# EAGLE board picrocope_hub_v2r3 (EAGLE 9.6.2)
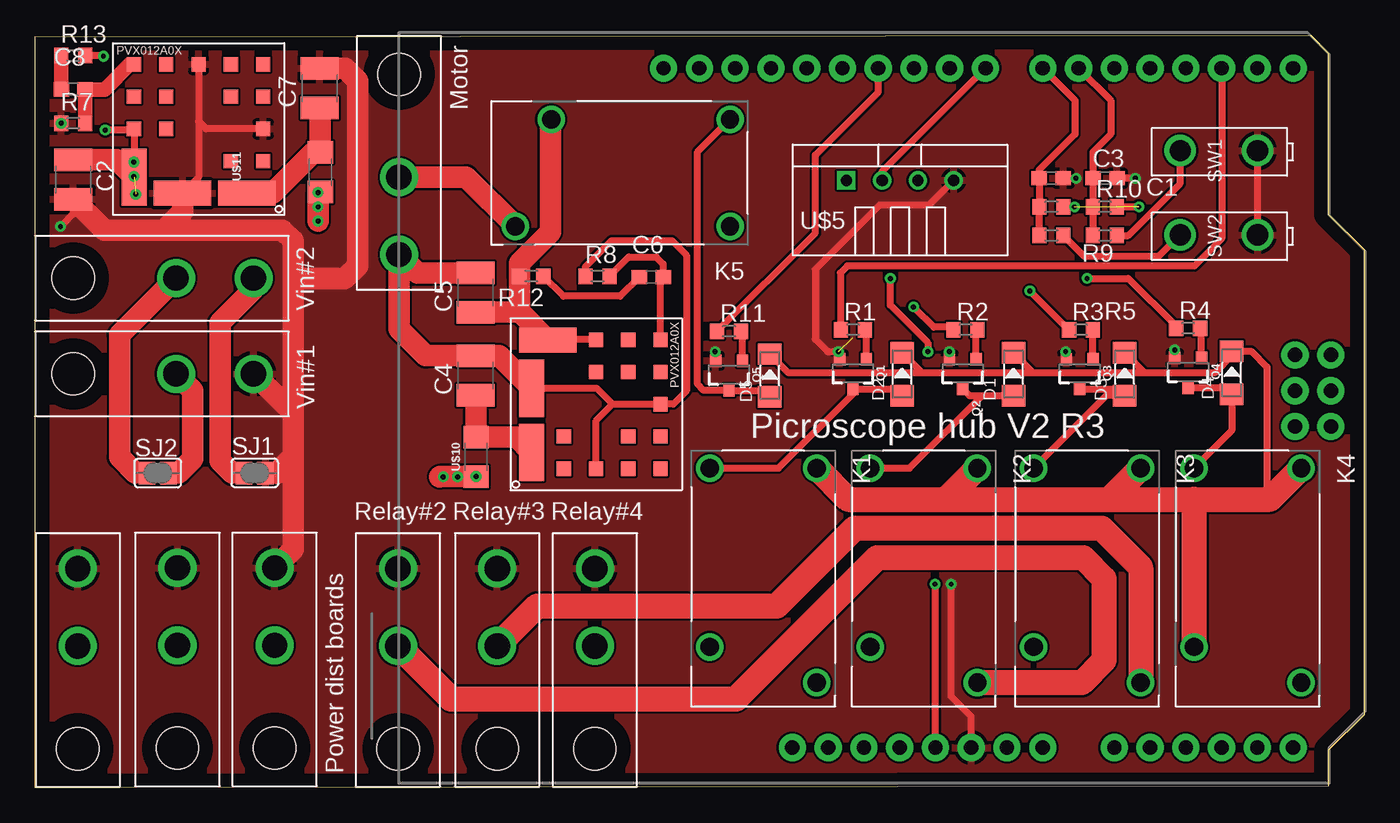
[diagram p0: board, top side]
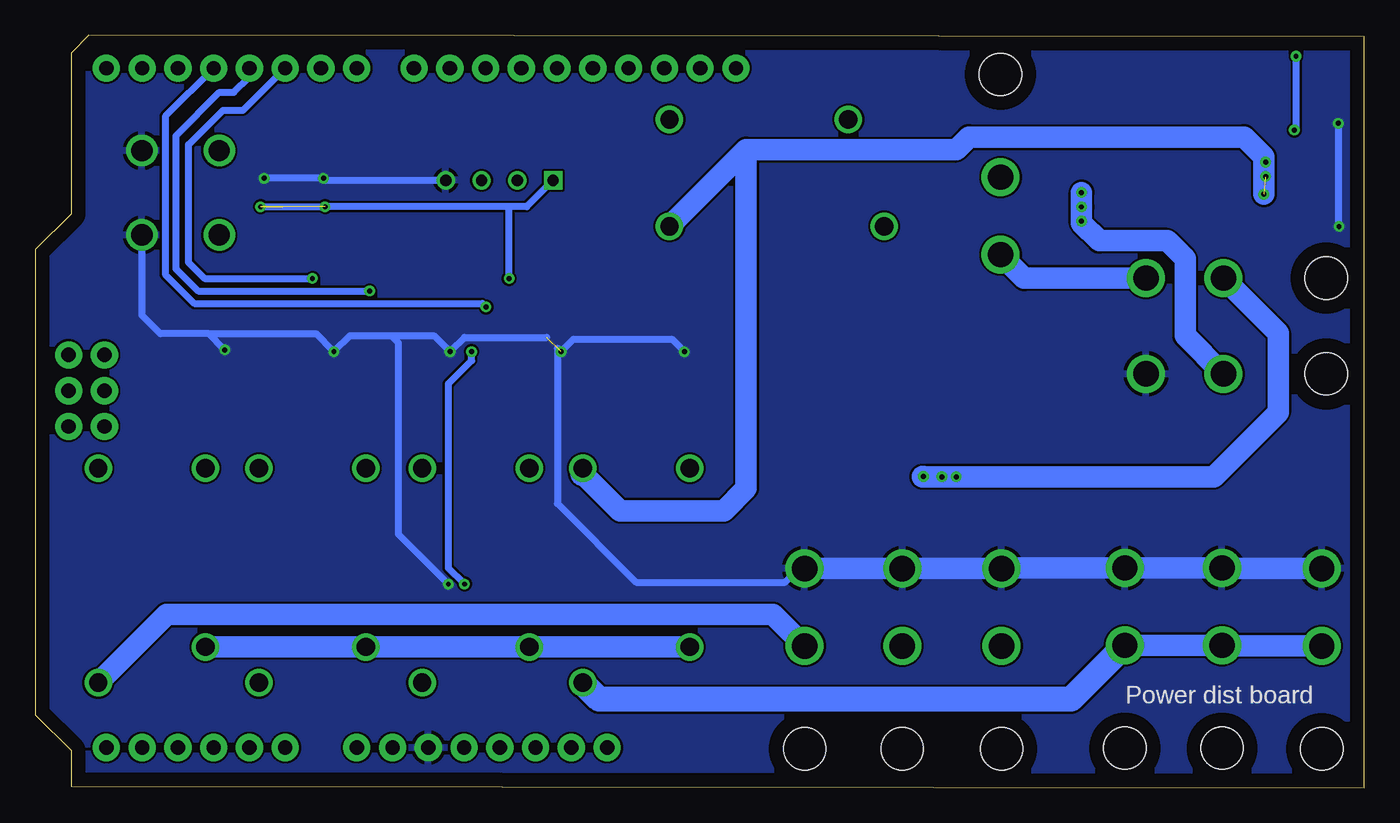
[diagram p1: board, bottom side, seen from below]

Size 94.38 x 53.44 mm. Coordinates in mm from the lower left corner, seen from the top.
Outline: 0,0 0,53.34 90.57,53.44 91.84,52.17 91.84,40.74 94.38,38.2 94.38,5.18 91.84,2.64 91.84,0.1 0,0
Copper layers (1*16): Top 0.035mm / dielectric 1.5mm / Bottom 0.035mm
Design rules "default *": minimum track width 20mil, minimum drill 0.35mm, track to track 6mil, track to pad 6mil, pad to pad 6mil, via to via 6mil, smd to smd 6mil, copper to edge 40mil, drill to drill 6mil, minimum pad ring 10mil, minimum via ring 8mil, stop-mask expansion 4mil, vias tented up to drill 0mil, thermal gap 10mil

## Footprints (pad centres in the part's own frame; a part is rotated, then mirrored left to right if it is on the bottom)
ARDUINO_R3 = drill 1.016 pad 1.93: 3.3V 2.54,-24.13; 5V 5.08,-24.13; A0 17.78,-24.13; A1 20.32,-24.13; A2 22.86,-24.13; A3 25.4,-24.13; A4 27.94,-24.13; A5 30.48,-24.13; AREF -9.144,24.13; D0 30.48,24.13; D1 27.94,24.13; D2 25.4,24.13; D3 22.86,24.13; D4 20.32,24.13; D5 17.78,24.13; D6 15.24,24.13; D7 12.7,24.13; D8 8.636,24.13; D9 6.096,24.13; D10 3.556,24.13; D11 1.016,24.13; D12 -1.524,24.13; D13 -4.064,24.13; GND@1 7.62,-24.13; GND@2 10.16,-24.13; GND@3 -6.604,24.13; GND@4 33.16,-1.32; IOREF -2.54,-24.13; MISO 30.62,3.76; MOSI 33.16,1.22; NC -5.08,-24.13; RESET@1 0,-24.13; RESET@2 30.62,-1.32; SCK 30.62,1.22; SCL -14.224,24.13; SDA -11.684,24.13; VCC 33.16,3.76; VIN 12.7,-24.13
C0603 = smd 1.1 x 1: 1 -0.85,0; 2 0.85,0
C1210 = smd 1.6 x 2.7: 1 -1.4,0; 2 1.4,0
LL-34 = smd 1.524 x 1.676: A -1.524,0; C 1.524,0
RELAY_2071508-1 = drill 1.3: 1 -7.85,3.8; 2 -7.85,-3.8; 3 7.39,3.8; 4 4.85,-3.8
SOT23-3 = smd 0.8 x 0.9: 1 -0.95,-1; 2 0.95,-1; 3 0,1.1
R0603 = smd 1 x 1.1: 1 -0.85,0; 2 0.85,0
SJ = smd 1.168 x 1.6: 1 -0.762,0; 2 0.762,0
PVX012A0X = smd 1.01 x 1.01: 8 3.81,1.52; 9 1.52,1.52; 11 3.81,3.81; 12 8.39,3.81; 13 8.39,6.1; 14 10.68,3.81; 15 8.39,1.52; 16 1.52,8.39; 17 3.81,8.39; GND 6.1,1.52; ON_OFF 1.52,6.1; PGOOD 1.52,3.81; SENSE 10.68,6.1; TRIM 10.68,1.52 | smd 4.07 x 1.77: GRN 7.24,10.67; VIN 2.67,10.67 | smd 1.77 x 4.07: VOUT 10.67,9.53
MINI-FIT_JR_CONN = drill 1.8: P$1 0,0; P$2 0,5.5 | hole 3: 0,-7.3
TEMP-HUM-SENSOR-DHT22 = drill 0.8 square: 1 -3.81,0 | drill 0.8: 2 -1.27,0; 3 1.27,0; 4 3.81,0
1206 = smd 1.6 x 1.8: 1 -1.4,0; 2 1.4,0
MINI-FIT_JR_VERTICAL_CONN = drill 1.5: P$1 0,0.1; P$2 0,5.6

## Placement (x,y rotation side)
B1  ARDUINO_UNO_R3  [ARDUINO_R3]  58.85,26.97 0 top
C1  0.1uF  [C0603]  72.16,43.28 0 top
C2  47 uF  [C1210]  2.7,43.19 270 top
C3  0.1uF  [C0603]  75.97,43.28 0 top
C4  47 uF  [C1210]  31.29,29.28 90 top
C5  47 uF  [C1210]  31.28,35.16 90 top
C6  100pF  [C0603]  43.75,36.26 0 top
C7  47 uF  [C1210]  20.2,49.69 90 top
C8  100pF  [C0603]  2.7,49.59 0 top
D1  1N4148  [LL-34]  69.47,29.37 90 top
D2  1N4148  [LL-34]  61.56,29.37 90 top
D3  1N4148  [LL-34]  77.37,29.37 90 top
D4  1N4148  [LL-34]  84.97,29.47 90 top
D5  1N4148  [LL-34]  52.17,29.27 90 top
K1  2071508-1  [RELAY_2071508-1]  51.7,14.84 270 top
K2  2071508-1  [RELAY_2071508-1]  63.1,14.84 270 top
K3  2071508-1  [RELAY_2071508-1]  74.7,14.84 270 top
K4  2071508-1  [RELAY_2071508-1]  86.1,14.84 270 top
K5  2071508-1  [RELAY_2071508-1]  41.49,43.66 180 top
Q1  600mA/40V  [SOT23-3]  58.08,29.42 180 top
Q2  600mA/40V  [SOT23-3]  65.87,29.42 180 top
Q3  600mA/40V  [SOT23-3]  74.17,29.42 180 top
Q4  600mA/40V  [SOT23-3]  81.87,29.52 180 top
Q5  600mA/40V  [SOT23-3]  49.27,29.32 180 top
R1  1k  [R0603]  58.08,32.52 0 top
R2  1k  [R0603]  66.07,32.52 0 top
R3  1k  [R0603]  74.27,32.52 0 top
R4  1k  [R0603]  81.87,32.62 0 top
R5  1k  [R0603]  72.16,39.22 180 top
R6  10k  [R0603]  72.16,41.25 0 top
R7  2.727k  [R0603]  2.7,47.19 0 top
R8  2.727k  [R0603]  39.93,36.33 0 top
R9  1k  [R0603]  75.97,39.22 180 top
R10  10k  [R0603]  75.97,41.25 0 top
R11  1k  [R0603]  49.27,32.42 0 top
R12  330  [R0603]  35.23,36.33 180 top
R13  330  [R0603]  2.7,51.98 0 top
SJ1  [SJ]  15.59,22.34 180 top
SJ2  [SJ]  8.71,22.34 0 top
U$1  PVX012A0XV1  [PVX012A0X]  17.7,52.88 180 top
U$2  PVX012A0XV1  [PVX012A0X]  45.93,21.13 90 top
U$3  MOLEX_0039301022  [MINI-FIT_JR_CONN]  10,29.39 270 top
U$4  MOLEX_0039301022  [MINI-FIT_JR_CONN]  10,36.19 270 top
U$5  TEMP-HUM-SENSOR-DHT22  [TEMP-HUM-SENSOR-DHT22]  61.41,43.13 0 top
U$6  MOLEX_0039301022  [MINI-FIT_JR_CONN]  3.02,10.06 0 top
U$7  MOLEX_0039301022  [MINI-FIT_JR_CONN]  25.76,10.06 0 top
U$8  MOLEX_0039301022  [MINI-FIT_JR_CONN]  32.81,10.06 0 top
U$9  MOLEX_0039301022  [MINI-FIT_JR_CONN]  39.75,10.06 0 top
U$10  PTC_1206  [1206]  31.31,23.49 90 top
U$11  PTC_1206  [1206]  20.25,43.7 90 top
U$12  MOLEX_0039301022  [MINI-FIT_JR_CONN]  17,10.1 0 top
U$13  MOLEX_0039301022  [MINI-FIT_JR_CONN]  10.1,10.1 0 top
U$14  MOLEX_0039301022  [MINI-FIT_JR_CONN]  25.84,43.36 180 top
U$15  MOLEX_0039296028  [MINI-FIT_JR_VERTICAL_CONN]  86.9,45.25 90 top
U$16  MOLEX_0039296028  [MINI-FIT_JR_VERTICAL_CONN]  86.9,39.26 90 top

## Library data of the parts
B1 = SparkFun-Boards
C1-C8 R7 R8 R12 R13 = adafruit
D1-D5 = Seeed-Diode; MPN: 1N4148
K1-K5 = 2071508-1; MANUFACTURER: TE Connectivity; MAXIMUM_PACKAGE_HEIGHT: 15.7mm; PARTREV: 0919; STANDARD: Manufacturer Recommendations
Q1-Q5 = SparkFun-DiscreteSemi; PROD_ID: TRANS-08049
R1-R6 R9-R11 = resistor
SJ1 SJ2 = jumper
U$1 U$2 = PVX012A0X
U$3 U$4 U$6-U$16 = pat
U$5 = diy-modules

## Nets
5V: B1.5V R6.2 R10.2 U$5.1
DHT_DAT: B1.D8 U$5.2
GND: B1.GND@1 C1.2 C2.2 C3.2 C7.2 Q1.2 Q2.2 Q3.2 Q4.2 Q5.2 R7.1 SJ1.1 U$1.GND U$1.GRN U$1.ON_OFF U$3.P$2 U$5.4 U$6.P$2 U$7.P$2 U$8.P$2 U$9.P$2 U$12.P$2 U$13.P$2 U$15.P$1 U$16.P$1
GND2: C4.2 C5.2 R8.1 SJ1.2 U$2.GND U$2.GRN U$2.ON_OFF U$4.P$2 U$14.P$2
N$1: Q1.1 R1.2
N$2: D2.A K1.2 Q1.3
N$3: SJ2.1 U$4.P$1 U$10.1
N$4: R5.1 U$16.P$2
N$5: Q2.1 R2.2
N$6: D1.A K2.2 Q2.3
N$7: Q3.1 R3.2
N$8: D3.A K3.2 Q3.3
N$9: Q4.1 R4.2
N$10: D4.A K4.2 Q4.3
N$12: R9.1 U$15.P$2
N$14: Q5.1 R11.2
N$15: C6.1 R12.1
N$16: C8.1 R13.1
N$17: D5.A K5.2 Q5.3
N$19: C6.2 R8.2 U$2.TRIM
N$20: C8.2 R7.2 U$1.TRIM
N$23: SJ2.2 U$3.P$1 U$11.1
O2: K2.3 U$7.P$1
O3: K3.3 U$8.P$1
O4: K4.3 U$9.P$1
O_MOTOR: K5.3 U$14.P$1
O_POWER_DIST: K1.3 U$6.P$1 U$12.P$1 U$13.P$1
P1: B1.D2 R1.1
P2: B1.D3 R2.1
P3: B1.D4 R3.1
P4: B1.D5 R4.1
P5: B1.D11 R11.1
SW1: B1.D6 C3.1 R9.2 R10.1
SW2: B1.D7 C1.1 R5.2 R6.1
VIN_1: C7.1 U$1.VIN U$11.2
VIN_2: C4.1 U$2.VIN U$10.2
VO_1: C2.1 D1.C D2.C D3.C D4.C D5.C K1.1 K1.4 K2.1 K2.4 K3.1 K3.4 K4.1 K4.4 K5.1 R13.2 U$1.SENSE U$1.VOUT
VO_2: C5.1 K5.4 R12.2 U$2.SENSE U$2.VOUT

## Tracks (layer width: path | path; a pad name or v marks a point on that pad's centre or on a via)
5V  (via drill 0.35)  (2 unrouted)
  Top 0.508: R6.2 v73.81,41.25 | B1.5V 63.93,14.42 v63.9,14.45 | v60.72,36.17 60.72,34.26 63.39,31.6 v63.39,30.96 | R10.2 v78.38,41.25
  Bottom 0.508: U$5.1 59.48,41.25 60.85,41.25 | 60.85,41.25 v73.81,41.25 v78.38,41.25 | v63.9,14.45 65.04,15.59 65.04,28.68 63.39,30.33 v63.39,30.96 | v60.72,36.17 60.72,41.12 60.85,41.25
DHT_DAT
  Top 0.508: U$5.2 60.14,43.76 B1.D8
GND  (via drill 0.35)  (1 unrouted)
  Top 0.508: Q5.2 48.32,30.92 v48.28,30.96 | v80.92,31.09 Q4.2 | v73.17,30.96 73.22,30.92 Q3.2 | v64.92,30.96 Q2.2 | Q1.2 57.12,30.88 v57.04,30.96 56.28,30.96 55.39,31.85 55.39,36.81 59.95,41.38 63.47,41.38 U$5.4 | C1.2 v73.91,43.28 | B1.GND@1 66.47,5.03 65.04,6.45 v65.04,14.45 | U$16.P$1 U$15.P$1 | U$1.ON_OFF 12.14,46.79 11.6,47.32 | U$1.GND 11.6,47.32 | 11.6,47.32 11.6,43.36 U$1.GRN | C2.2 2.7,40.75 v1.8,39.85 | v78.12,43.28 C3.2
  Top 1.27: SJ1.1 17.15,22.34
  Top 1.524: C2.2 4.89,39.6 9.16,39.6 | U$1.GRN 10.46,40.89 9.16,39.6 | 17.16,22.33 17.15,22.34 18.31,23.5 | U$3.P$2 15.57,29.39 18.31,26.64 | 18.31,26.64 18.31,23.5 | 18.31,23.5 18.31,16.91 U$12.P$2 | 9.16,39.6 17.55,39.6 18.31,38.84 18.31,36.17 | 18.31,36.17 18.31,26.64 | C7.2 21.99,51.09 22.88,50.2 22.88,37.06 21.99,36.17 18.31,36.17
  Bottom 0.508: v48.28,30.96 49.17,31.85 56.15,31.85 v57.04,30.96 57.3,31.21 57.3,20.17 51.71,14.58 41.12,14.58 40.14,15.56 U$9.P$2 | 58.06,31.98 63.9,31.98 v64.92,30.96 66.06,32.1 69.11,32.1 | 69.11,32.1 72.03,32.1 v73.17,30.96 74.44,32.23 82.06,32.23 | 80.92,30.96 v80.92,31.09 82.06,32.23 | U$5.4 73.76,43.13 v73.91,43.28 v78.12,43.28 | U$16.P$1 86.8,33.55 85.49,32.23 82.06,32.23 | v65.04,14.45 68.6,18.01 68.6,31.6 69.11,32.1 | R7.1 1.8,47.13 v1.8,39.85
  Bottom 1.524: U$6.P$2 10.06,15.56 U$13.P$2 U$12.P$2 25.72,15.6 U$7.P$2 U$8.P$2 40.14,15.56 40.3,15.4
  other vias: 1.85,47.19
  pour Top: -2.18,55.98 -2.18,-4.98 96.92,-4.98 96.92,55.98
  pour Bottom: -2.18,55.98 -2.18,-4.98 96.92,-4.98 96.92,55.98
GND2
  Top 0.508: U$2.ON_OFF 39.83,26.07 40.99,27.23 | 40.99,27.23 U$2.GND 45.31,27.23 46.25,28.17 46.25,37.82 45.23,38.84 40.91,38.84 39.08,37 R8.1 | U$2.GRN 39.85,28.37 40.99,27.23
  Top 1.27: 13.97,22.34 SJ1.2
  Top 1.524: U$4.P$2 15.5,35.39 13.12,33.02 13.12,23.19 13.97,22.34 | U$2.GRN 32.95,30.68 C4.2 27.74,30.68 25.84,32.58 U$14.P$2 27.14,36.56 C5.2
  Bottom 1.524: U$4.P$2 24.16,36.19 U$14.P$2
N$1
  Top 0.508: Q1.1 59.03,32.42 R1.2
N$2
  Top 0.508: K1.2 52.79,22.69 58.08,27.97 Q1.3 61.08,28.32 D2.A
N$3  (via drill 0.35)
  Top 1.27: 7.11,22.34 SJ2.1
  Top 1.524: U$4.P$1 5.99,32.17 5.99,23.47 7.11,22.34 | U$10.1 28.74,22.09 28.72,22.07
  Bottom 1.524: U$4.P$1 6.12,32.3 6.12,26.64 10.69,22.07 v28.98,22.07 v29.99,22.07 31.39,22.07 31.37,22.09 U$10.1
  other vias: 31.31,22.09
N$4
  Top 0.508: 73,39.13 R5.1 74.5,37.72 79.77,37.72 U$16.P$2
N$5
  Top 0.508: Q2.1 66.82,32.42 R2.2
N$6
  Top 0.508: Q2.3 66.34,27.84 D1.A 67.25,27.84 62.09,22.69 K2.2
N$7
  Top 0.508: Q3.1 R3.2
N$8
  Top 0.508: Q3.3 76.89,28.32 D3.A 76.06,27.85 K3.2
N$9
  Top 0.508: Q4.1 82.82,32.52 R4.2
N$10
  Top 0.508: Q4.3 84.49,28.42 D4.A 84.97,25.36 K4.2
N$11  (via drill 0.35)
  other vias: 7,43.41
N$12
  Top 0.508: R9.1 77.62,39.22 81.3,42.9 U$15.P$2
N$13  (via drill 0.35)
  other vias: 7,44.42
N$14
  Top 0.508: Q5.1 50.22,32.32 R11.2
N$15
  Top 0.508: C6.1 41.53,34.9 37.51,34.9 R12.1
N$16
  Top 1.016: R13.1 C8.1
N$17
  Top 0.508: D5.A 51.69,28.22 Q5.3 47.47,28.22 47.03,28.65 47.03,45.16 K5.2
N$19
  Top 0.508: U$2.TRIM 44.41,36.07 C6.2 44.6,37.18 44.09,37.69 42.14,37.69 R8.2
N$20
  Top 1.016: R7.2 C8.2 4.93,49.59 6.71,51.37 U$1.TRIM
N$23  (via drill 0.35)
  Top 1.27: SJ2.2 10.2,22.34
  Top 1.524: U$3.P$1 11.2,28.19 11.2,23.34 10.2,22.34 | v20.09,40.23 v20.09,41.25 20.09,42.14 U$11.1
  Bottom 1.524: U$3.P$1 12.72,32.1 12.72,37.57 13.99,38.84 18.82,38.84 20.09,40.11 v20.09,40.23 v20.09,41.25 v20.09,42.26
O2
  Top 1.778: U$7.P$1 29.52,6.3 49.77,6.3 59.8,16.34 74.4,16.34 75.9,14.84 75.9,9.04 74.31,7.45 K2.3
O3
  Top 1.778: U$8.P$1 35.65,12.9 52.66,12.9 58.2,18.44 75.71,18.44 78.5,15.65 K3.3
O4
  Bottom 1.524: K4.3 85.06,12.29 41.98,12.29 U$9.P$1
O_MOTOR
  Top 1.524: U$14.P$1 30.6,43.36 K5.3
O_POWER_DIST
  Bottom 1.524: U$6.P$1 10.06,10.06 U$13.P$1 U$12.P$1
  Bottom 1.778: U$12.P$1 20.83,6.27 54.33,6.27 K1.3
P1
  Top 0.508: B1.D2 84.25,38.99 82.31,37.06 57.68,37.06 57.17,36.55 57.17,32.58 R1.1
P2  (via drill 0.35)
  Top 0.508: v62.38,34.14 63.81,32.7 65.04,32.7 R2.1
  Bottom 0.508: B1.D3 85.14,47.67 85.14,36.45 83.08,34.39 62.63,34.39 v62.38,34.14
P3  (via drill 0.35)
  Top 0.508: v70.63,35.28 73.27,32.64 73.3,32.64 R3.1
  Bottom 0.508: v70.63,35.28 82.82,35.28 84.37,36.83 84.37,46.3 81.3,49.38 80.28,49.38 79.17,50.49 B1.D4
P4  (via drill 0.35)
  Top 0.508: R4.1 81.02,32.77 77.62,36.17 v74.7,36.17
  Bottom 0.508: v74.7,36.17 82.35,36.17 83.48,37.3 83.48,45.67 81.05,48.11 79.62,48.11 B1.D5
P5
  Top 0.508: B1.D11 59.86,49.4 55.39,44.93 55.39,39.4 R11.1
SW1
  Top 0.508: B1.D6 76.37,48.81 76.37,46.4 75.11,45.14 C3.1 R10.1 R9.2
SW2
  Top 0.508: B1.D7 73.83,48.81 73.83,46.4 71.31,43.87 C1.1 R6.1 R5.2
VIN_1
  Top 1.524: C7.1 20.25,48.23 U$11.2 19.75,45.1 16.86,42.22 U$1.VIN
VIN_2
  Top 1.524: C4.1 31.31,27.85 U$10.2 34.16,24.89 U$2.VIN
VO_1  (via drill 0.35)  (1 unrouted)
  Top 0.508: 78.8,29.46 83.76,29.46 84.97,30.67 D4.C 86.35,30.99 87.47,29.87 87.47,20.47 | 78.8,29.46 70.9,29.46 | 70.9,29.46 62.99,29.46 | 62.99,29.46 53.5,29.46 D5.C | D2.C 62.99,29.46 | D1.C 70.9,29.46 | D3.C 78.8,29.46 | U$1.VOUT 7.02,43.37 U$1.SENSE 6.94,46.71 v4.97,46.71 | v4.85,51.95 4.81,51.98 R13.2
  Top 1.524: U$1.VOUT 5.8,44.59 C2.1
  Top 1.778: K1.1 57.72,20.47 64.68,20.47 | 64.68,20.47 K2.1 | 64.68,20.47 76.28,20.47 | 76.28,20.47 K3.1 | 76.28,20.47 82.3,20.47 | 82.3,20.47 87.47,20.47 87.68,20.47 K4.1 | K4.4 82.3,20.47
  Bottom 0.508: v4.97,46.71 4.85,46.84 v4.85,51.95
  Bottom 1.524: K5.1 43.89,45.31 | 43.89,45.31 28.98,45.31 28.09,46.2 8.53,46.2 7.13,44.8 v7.13,42.14 | 43.89,45.31 43.89,21.25 45.48,19.66 52.85,19.66 55.5,22.31 | K1.4 K2.4 K3.4 K4.4
  Bottom 1.778: 55.5,22.31 K1.1
VO_2
  Top 0.508: U$2.SENSE U$2.VOUT
  Top 1.524: U$2.VOUT 34.44,33.76 | 34.44,33.76 C5.1 | 34.44,33.76 34.38,33.82 R12.2 34.38,37.25 36.59,39.47 36.59,47.42 K5.4

## Text on the board
tPlace: Motor | SW1 | SW2 | Vin#2 | Vin#1 | Picroscope hub V2 R3 | Relay#2 | Relay#3 | Relay#4 | Power dist boards
bPlace: - + | - + | Power dist board